# Altium PCB UARC_Sensor.PcbDoc (part 2 of 2)
Units mm, origin at the board's own origin, x right, y up, seen from the top; angles counter-clockwise.
Board outline 60.1 x 84.97 mm, 2 copper layers (Top Layer, Bottom Layer); 85 components, 78 nets, 396 pads, 103 vias.
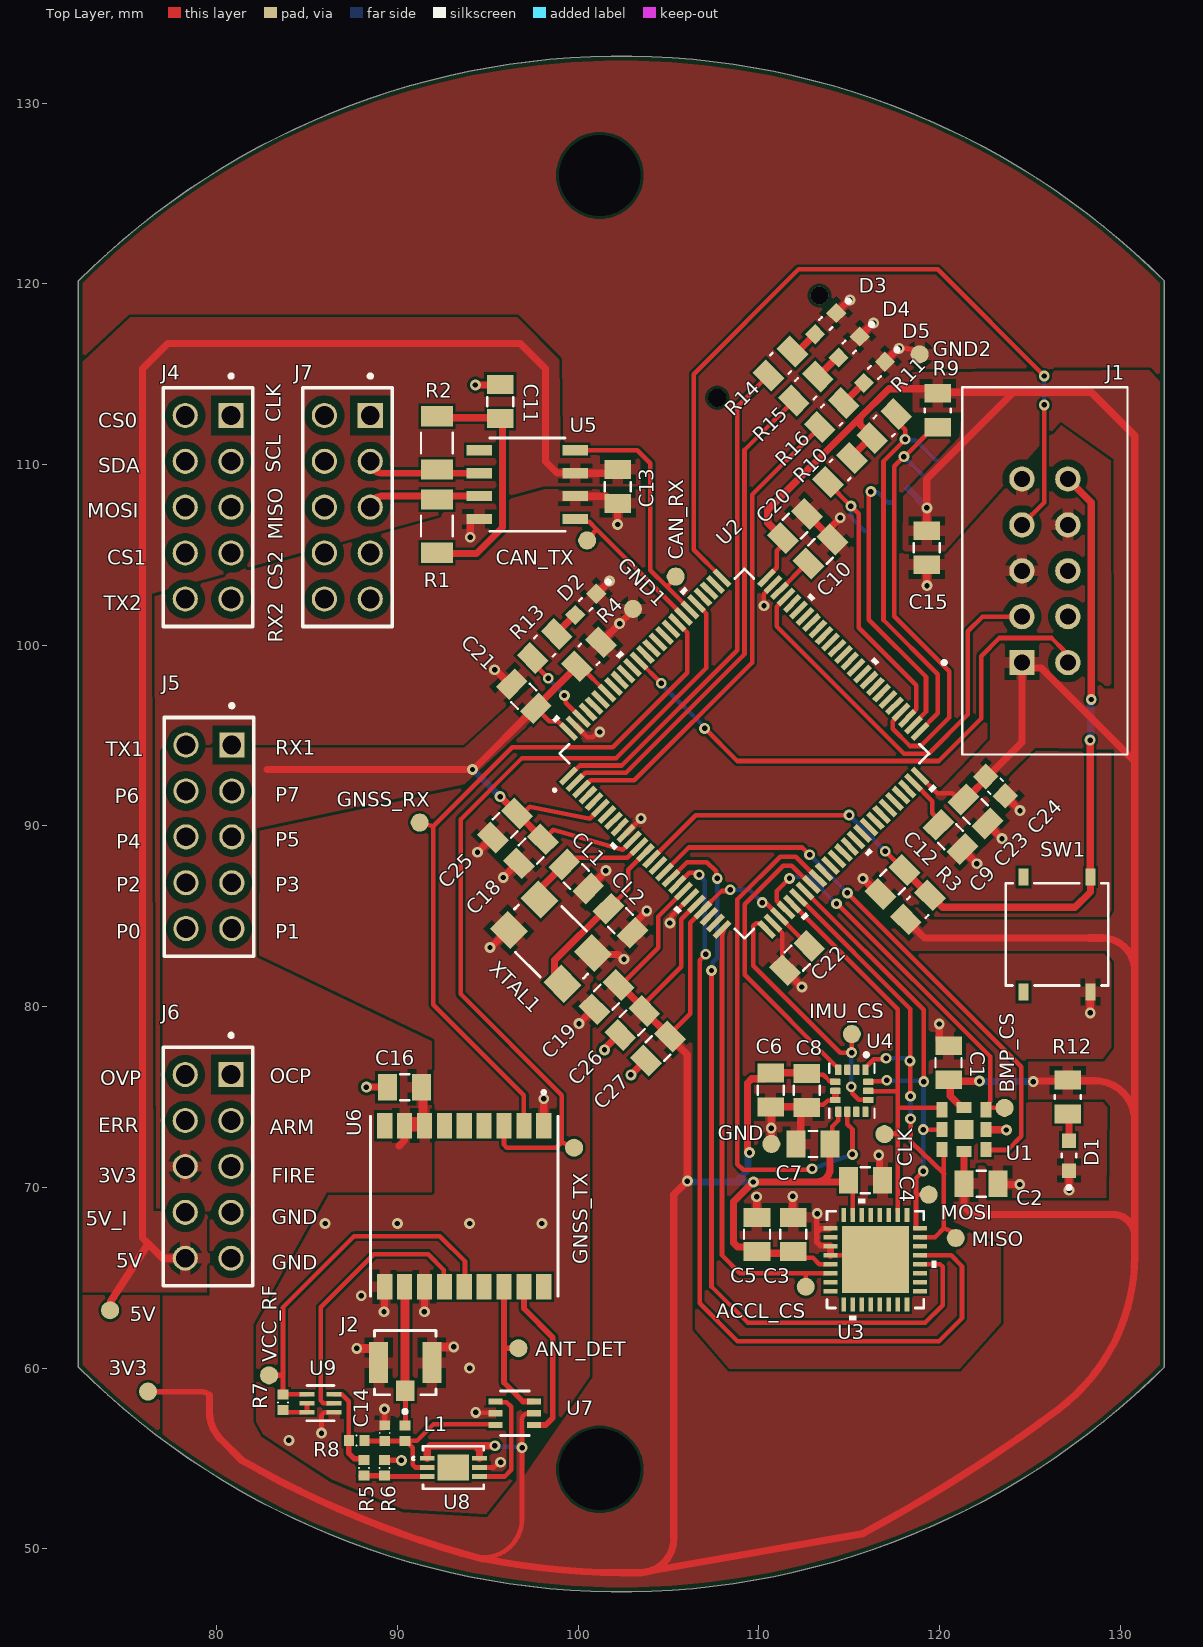
[diagram p0: Top Layer view]

## Polygon pours and split planes (outlines as drawn) (continued)
VDD on Top Layer "VDD_L01_P005" (solid, pour order 5): 82.204,82.735 82.231,89.862 93.7,92.3 98.487,96.787 97.487,97.787 93.7,94.315 77.02,94.326 77.02,68.68 79.625,68.68 79.625,64 77.02,64 77.02,55.385 79.076,54.463 80.333,53.235 89.346,49.323 105.313,46.357 116.261,49.332 133.1,58.77 133.1,113.624 131.586,115.234 118.519,115.1 118.519,112.875 121.239,112.9 121.111,111.544 117.986,108.245 117.977,105.2 120.283,105.2 126.715,112.381 129.632,110.3 129.678,97.6 129.111,97.6 125.986,100.6 122.8,100.6 122.8,94.761 119.774,91.626 121.5,89.9 122.707,91.107 122.386,91.427 125.285,94.326 129.662,94.224 129.678,85.3 129.4,84.8 119.483,84.8 118.592,85.693 117.25,84.35 118.519,83.081 129.21,83.09 129.678,82.495 129.678,77.7 129.111,76.961 124.9,76.961 124.9,74.889 129.111,74.889 129.451,74.496 129.4,69.257 128.4,69.257 122.6,69.257 122.6,71.2 120.8,71.2 120.8,68.093 123.55,66.8 123.55,62.45 121.186,59.8 108.3,59.8 106.313,62.1 106.313,78.312 102.137,82.434 100.805,81.195 100.805,59.504 97,54 97.051,57.214 98.014,57.214 98.014,57.903 97.088,57.898 96.6,57.562 96.6,53.8 94.971,51.736 90.283,52.023 86.28,53.696 84.6,54.8 82.454,56.211 82.033,56.998 82.033,62.422 86.095,69.743 91.9,69.743 91.9,78.1
5V on Top Layer "5V_L01_P006" (solid, pour order 6): 71.111,64.2 79.625,64.2 79.625,68.68 76.5,68.68 76.408,102.841 98.121,108.8 103.45,108.8 103.45,110.7 99.037,110.7 98.967,115.807 96.632,118.141 75.229,118.141 71.6,114.766
GND on Top Layer "GND_L01_P007" (solid, pour order 7): 72.338,60.066 ccw(c102.391,90.118) 132.443,60.066 132.443,120.152 ccw(c102.39,90.1) 72.338,120.152

## Silkscreen, mask and mechanical layers (free items; w line width, h text height)
Top Overlay:
  text "CLK" at 83.55,112.35 h0.8 r90
  text "CS0" at 73.45,112.05 h0.8
  text "SDA" at 73.45,109.55 h0.8
  text "SCL" at 83.55,109.55 h0.8 r90
  text "MOSI" at 72.85,107.05 h0.8
  text "MISO" at 83.65,105.85 h0.8 r90
  text "CS1" at 73.95,104.45 h0.8
  text "CS2" at 83.65,103.05 h0.8 r90
  text "TX2" at 73.75,101.95 h0.8
  text "RX2" at 83.65,100.15 h0.8 r90
  text "RX1" at 83.25,93.95 h0.8
  text "TX1" at 73.85,93.85 h0.8
  text "P7" at 83.25,91.35 h0.8
  text "P6" at 74.35,91.25 h0.8
  text "P5" at 83.25,88.85 h0.8
  text "P4" at 74.45,88.75 h0.8
  text "P2" at 74.45,86.35 h0.8
  text "P3" at 83.25,86.35 h0.8
  text "P0" at 74.45,83.75 h0.8
  text "P1" at 83.25,83.75 h0.8
  text "OCP" at 82.95,75.75 h0.8
  text "OVP" at 73.55,75.65 h0.8
  text "ERR" at 73.45,73.05 h0.8
  text "ARM" at 82.95,72.95 h0.8
  text "3V3" at 73.45,70.25 h0.8
  text "FIRE" at 83.05,70.25 h0.8
  text "GND" at 83.05,67.95 h0.8
  text "5V_I" at 72.75,67.883 h0.8
  text "5V" at 74.45,65.55 h0.8
  text "GND" at 83.05,65.45 h0.8
Mechanical 1:
  the board outline again, w0.254

## Text inside footprints (layer, text, board x,y; h text height)
U1: Mechanical 13 "*" at 120.906,73.665 h1.27
U3: Mechanical 13 "*" at 114.037,67.365 h1.27
U7: Mechanical 13 "*" at 95.89,57.259 h1.27